# Altium PCB PIC18F57Q84_Curiosity_Nano.PcbDoc (part 1 of 3)
Units mm, origin at the board's own origin, x right, y up, seen from the top; angles counter-clockwise.
Board outline 83.82 x 20.32 mm, 4 copper layers (Top Layer, Gnd Plane, Pwr Plane, Bottom Layer), stack 1.574 mm thick; 85 components, 108 nets, 442 pads, 224 vias.
Unrouted connection lines stored in the file: 1.
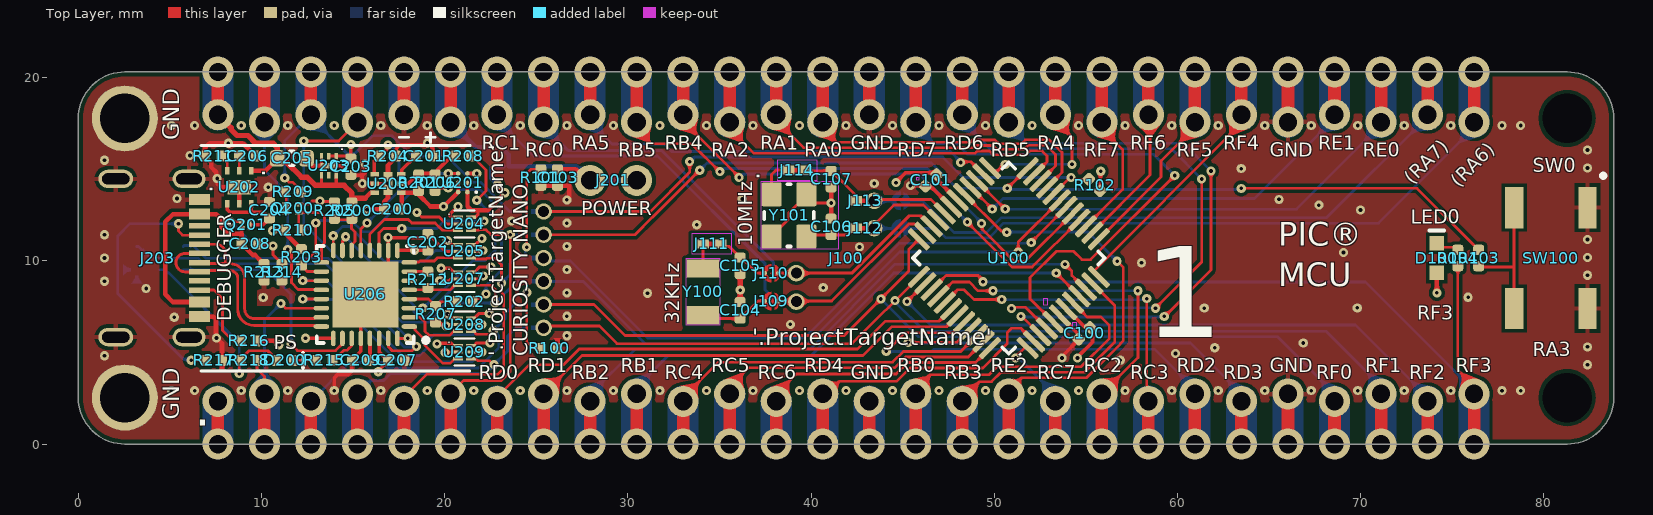
[diagram p0: Top Layer view]
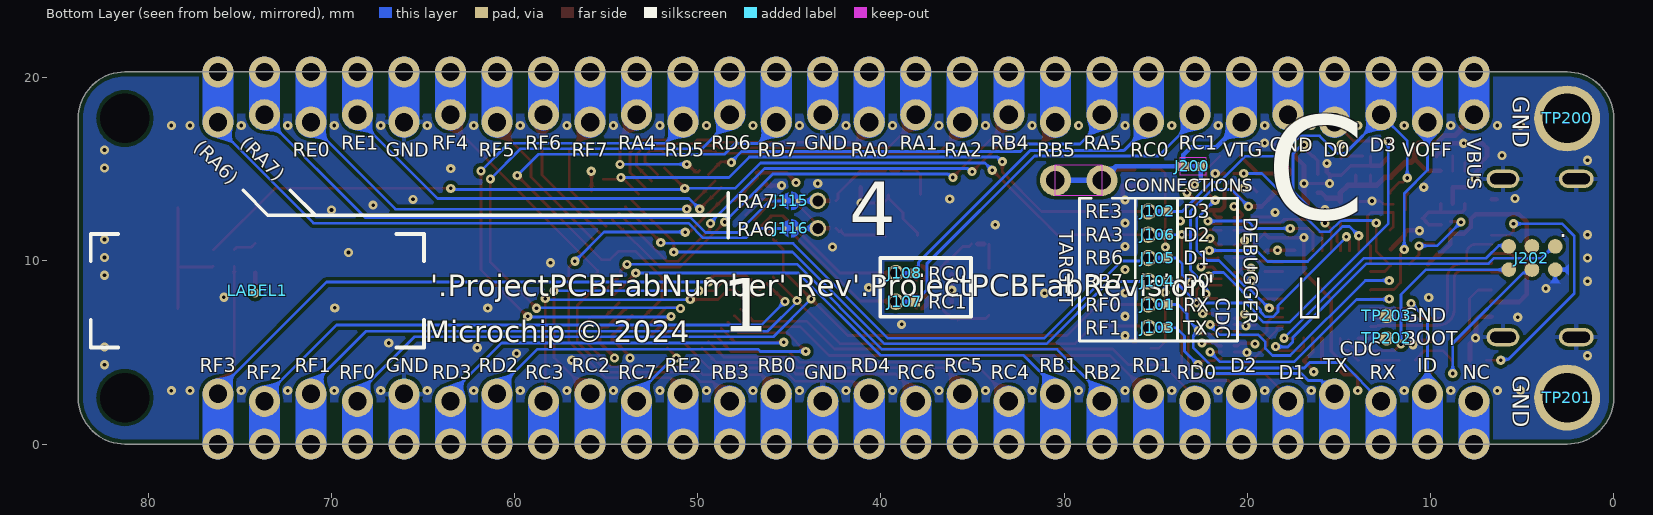
[diagram p1: Bottom Layer view, seen from below]
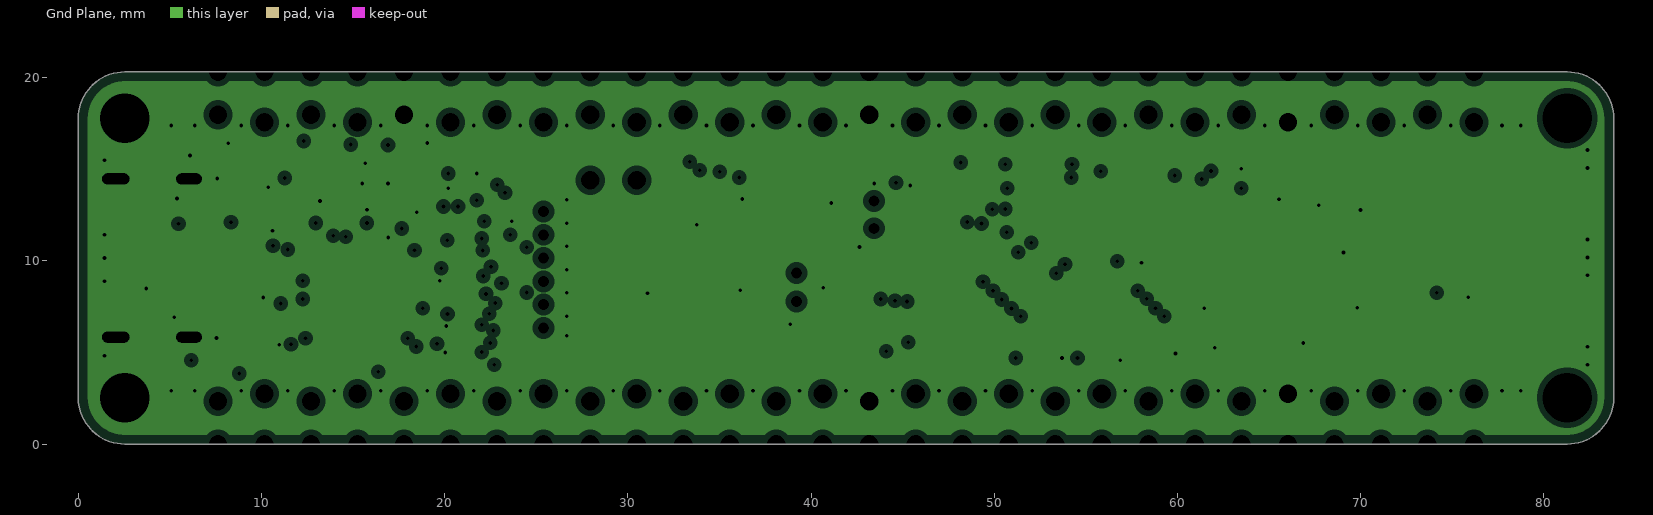
[diagram p2: Gnd Plane, clearances drawn from the general rule]
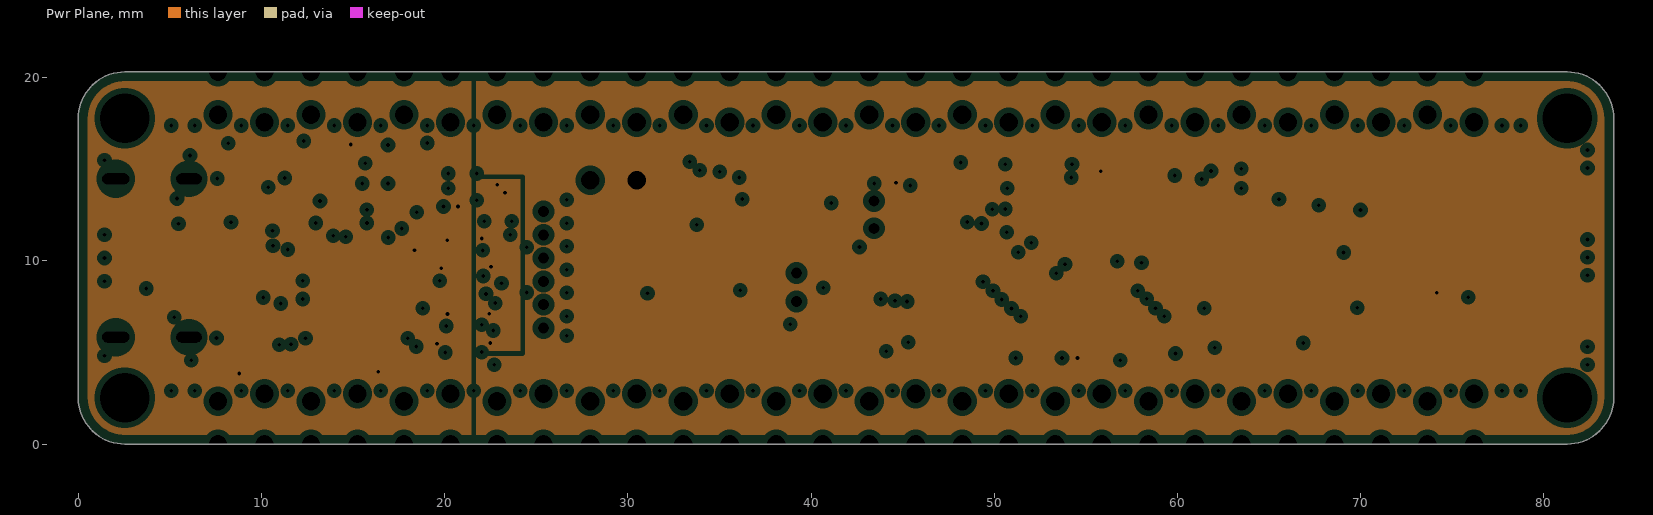
[diagram p3: Pwr Plane, clearances drawn from the general rule]

## Layer stack, top to bottom
Top Solder: solder mask 0.01, Solder Resist, Dk 3.5
Top Layer: signal copper 0.035
Dielectric 1: prepreg 0.1168, PP-016, Dk 4.4
Gnd Plane: plane copper 0.035, net GND
Dielectric2: core 1.2, FR-4, Dk 4.2
Pwr Plane: plane copper 0.035, net (Multiple Nets)
Dielectric 3: prepreg 0.1168, PP-016, Dk 4.4
Bottom Layer: signal copper 0.035
Bottom Solder: solder mask 0.01, Solder Resist, Dk 3.5

## Board outline
0,2.54 0,17.78 cw(c2.54,17.78) 2.54,20.32 81.28,20.32 cw(c81.28,17.78) 83.82,17.78 83.82,2.54 cw(c81.28,2.54) 81.28,0 2.54,0 cw(c2.54,2.54)

## Design rules (kind name [scope] priority, off if disabled: settings)
AcuteAngle [All] p1: minimum=8.00000000000000E+0001 checktracksonly=FALSE
AssemblyTestPointUsage [All] p1: valid=2 allowmultiple=TRUE
AssemblyTestpoint CNANO_Testpoints [HasCompParameterValue('MCHP-ID','CON2115') Or HasCompParameterValue('MCHP-ID','CON2119') Or HasCompParameterValue('MCHP-ID','CON2120')] p1: testpointundercomponent=TRUE minsize=0.8 maxsize=2.54 preferedsize=0.8 minholesize=0 maxholesize=1.27 preferedholesize=0.25 testpointgrid=0.025 usegrid=FALSE gridtolerance=0 allowsidebottom=TRUE minspacing=1.27
AssemblyTestpoint [All] p2: testpointundercomponent=FALSE minsize=0.8 maxsize=2.54 preferedsize=0.8 minholesize=0 maxholesize=1.27 preferedholesize=0.25 testpointgrid=0.025 usegrid=FALSE gridtolerance=0 allowsidebottom=TRUE minspacing=1.27 compbodyclearance=1.27
BoardOutlineClearance BoardOutlineClearance_edge_connector [InComponent('J100')] p1: gap=0 ignorepadtopadclearanceinfootprint=FALSE
BoardOutlineClearance BoardOutlineClearance_LAYERNAME [IsText and (X1 >= 100) and (Y1 <= -60)] p2: gap=0 ignorepadtopadclearanceinfootprint=FALSE
BoardOutlineClearance [All] p3: gap=0.25 ignorepadtopadclearanceinfootprint=FALSE
Clearance Clearance_Poly_Impedance [IsRegion vs InDifferentialPairClass('All Differential Pairs')] p1: gap=0.6 ignorepadtopadclearanceinfootprint=FALSE
Clearance Clearance_Poly [InPoly] p2: gap=0.2 ignorepadtopadclearanceinfootprint=FALSE
Clearance [All] p3: gap=0.15 ignorepadtopadclearanceinfootprint=FALSE except(0.3: Arc-Hole Track-Hole SMDPad-Hole THPad-Hole Via-Hole Fill-Hole Poly-Hole Region-Hole Text-Hole)
ComponentClearance ComponentClearance_EDGE [InComponent('J100')] p1: gap=0 collisioncheckmode=3 verticalgap=0 showdistances=FALSE
ComponentClearance [All] p2: gap=0.254 collisioncheckmode=3 verticalgap=0.254 showdistances=TRUE donotcheckwithout3dbody=TRUE
DiffPairsRouting [All] p1: maxlimit=0.22 minlimit=0.22 mostfreqgap=0.22 toplayer_minwidth=0.16 toplayer_maxwidth=0.16 toplayer_prefwidth=0.16 bottomlayer_minwidth=0.16 bottomlayer_maxwidth=0.16 bottomlayer_prefwidth=0.16 maxuncoupledlength=5
FabricationTestPointUsage TestPointUsage [All] p1 off: valid=2 allowmultiple=TRUE
FabricationTestpoint Testpoint [All] p1 off: side=2 testpointundercomponent=TRUE minsize=0.8 maxsize=2.54 preferedsize=0.8 minholesize=0 maxholesize=1.27 preferedholesize=0.25 testpointgrid=0 allowsidebottom=TRUE usegrid=FALSE gridtolerance=0 minspacing=1.27
HoleSize [All] p1: absolutevalues=TRUE maxlimit=6.2 minlimit=0.2 maxpercent=80.000 minpercent=20.000
HoleToHoleClearance [All] p1: gap=0.3 allowstackedmicrovias=FALSE
MinimumAnnularRing [All] p1: minimumring=0.15
MinimumSolderMaskSliver LevelShifters [HasCompParameterValue('MCHP-ID','IC1665')] p1: minsoldermaskwidth=0.075
MinimumSolderMaskSliver [All] p2: minsoldermaskwidth=0.08
NetAntennae [Not IsTestpoint] p1: netantennaetolerance=0
PlaneClearance [All] p1: clearance=0.3
PlaneConnect PlaneConnect_MountingHoles [HasPad('TP200-1') OR HasPad('TP201-1')] p1: planeconnectstyle=Direct reliefexpansion=0.508 reliefentries=4 reliefconductorwidth=0.254 reliefairgap=0.254
PlaneConnect [All] p2: pad.planeconnectstyle=Relief pad.reliefexpansion=0.25 pad.reliefentries=4 pad.reliefconductorwidth=0.25 pad.reliefairgap=0.25 via.planeconnectstyle=Direct via.reliefexpansion=0.508 via.reliefentries=4 via.reliefconductorwidth=0.254 via.reliefairgap=0.254
PolygonConnect PolygonConnect_Special [HasPad('TP200-1') OR HasPad('TP201-1') OR HasPad('TP203-1')] p1: connectstyle=Direct reliefconductorwidth=0.254 reliefentries=4 polygonreliefangle="90 Angle" airgapwidth=0.254
PolygonConnect [All] p2: thpad.connectstyle=Relief thpad.reliefconductorwidth=0.254 thpad.reliefentries=4 thpad.polygonreliefangle="90 Angle" thpad.airgapwidth=0.2 smdpad.connectstyle=Relief smdpad.reliefconductorwidth=0.254 smdpad.reliefentries=4 smdpad.polygonreliefangle="90 Angle" smdpad.airgapwidth=0.2 via.connectstyle=Direct via.reliefconductorwidth=0.254 via.reliefentries=4 via.polygonreliefangle="90 Angle" via.airgapwidth=0.2
RoutingVias [All] p1: holewidth=0.25 width=0.55 viastyle="Through Hole" minholewidth=0.2 minwidth=0.5 maxholewidth=0.5 maxwidth=1
SMDNeckDown [All] p1: percent=98.000
SilkToSilkClearance SilkToSilkClearance_Text [IsText] p1: silktosilkclearance=0
SilkToSilkClearance [All] p2: silktosilkclearance=0.1
SilkToSolderMaskClearance SilkscreenOverComponentPads_Soldermask [All] p1: minsilkscreentomaskgap=0.12 clearancetoexposedcopper=FALSE
SilkToSolderMaskClearance SilkscreenOverComponentPads_Copper [All] p2: minsilkscreentomaskgap=0.2 clearancetoexposedcopper=TRUE
SolderMaskExpansion SolderMaskTenting [IsVia AND NOT (IsFabTestpoint OR IsAssyTestpoint)] p1: expansion=-1 istentingtop=FALSE
SolderMaskExpansion [All] p2: expansion=0.06 istentingtop=FALSE
SupplyNets "Schematic Supply Nets_9" [InNet('VCC_REGULATOR')] p1: voltage=0.000
SupplyNets "Schematic Supply Nets_8" [InNet('VBUS')] p2: voltage=0.000
SupplyNets "Schematic Supply Nets_7" [InNet('VCC_VBUS')] p3: voltage=0.000
SupplyNets "Schematic Supply Nets_6" [InNet('GND')] p4: voltage=0.000
SupplyNets "Schematic Supply Nets_5" [InNet('VCC_EDGE')] p5: voltage=0.000
SupplyNets "Schematic Supply Nets_4" [InNet('VCC_P3V3')] p6: voltage=0.000
SupplyNets "Schematic Supply Nets_3" [InNet('VCC_MCU_CORE')] p7: voltage=0.000
SupplyNets "Schematic Supply Nets_2" [InNet('VCC_LEVEL')] p8: voltage=0.000
SupplyNets "Schematic Supply Nets_1" [InNet('VCC_TARGET')] p9: voltage=0.000
SupplyNets "Schematic Supply Nets" [InNet('VBUS_DELAYED')] p10: voltage=0.000
UnRoutedNet [All] p1: checkbadconnections=TRUE
ViasUnderSMD ViasUnderSMD_Testpoint [HasPad('TP202-1') OR HasPad('U200-7')] p1: allowed=TRUE
ViasUnderSMD [All] p2: allowed=FALSE
Width [All] p1: maxlimit=10 minlimit=0.125 preferedwidth=0.15 minimp=50.000000 maximp=50.000000 favimp=50.000000
15 further rules are at their usual default settings.

## Classes and differential pairs
component class PIC18F57Q84_Curiosity_Nano_TopLevel: LABEL1 Test1 Test2
component class S2: C100 C101 C103 C104 C105 C106 C107 D100 J100 J101 J102 J103 J104 J105 J106 J107 J108 J109 J110 J111 J112 J113 J114 J115 J116 R100 R101 R102 R103 R104 SW100 U100 Y100 Y101
component class S1: C200 C201 C202 C203 C204 C205 C206 C207 C208 C209 D200 J200 J201 J202 J203 Q200 Q201 R200 R201 R202 R203 R204 R205 R206 R207 R208 R209 R210 R211 R212 R213 R214 R215 R216 R217 R218 TP200 TP201 TP202 TP203 U200 U201 U202 U203 U204 U205 U206 U207 U208 U209
net class Power: GND VCC_EDGE VCC_LEVEL VCC_P3V3 VCC_REGULATOR VCC_VBUS
differential pair USBD: +USBD_P -USBD_N

## Components (designator, comment, footprint, x,y, rotation, side; value= is the part's Value field where it differs from the comment)
C100 "Capacitor NP" CAP_C_0402#1 54.925,6.05 r225 top locked value=0.1uF
C101 "Capacitor NP" CAP_C_0402#1 46.55,14.4 r45 top locked value=0.1uF
C103 "Capacitor NP" CAP_C_0402#1 26.162,14.554 r90 top locked value=2.2uF
C104 "Capacitor NP" CAP_C_0402#2 36.135,7.3 r270 top locked value=3.9pF
C105 "Capacitor NP" CAP_C_0402#2 36.135,9.736 r270 top locked value=3.9pF
C106 "Capacitor NP" CAP_C_0402#1 41.1,11.86 r270 top locked value=18pF
C107 "Capacitor NP" CAP_C_0402#1 41.1,14.47 r90 top locked value=22pF
C200 "Capacitor NP" CAP_C_0402#1 17.145,12.827 r0 top locked value=2.2uF
C201 "Capacitor NP" CAP_C_0402#1 18.88,15.725 r0 top locked value=0.1uF
C202 "Capacitor NP" CAP_C_0402#1 19.08,11.025 r270 top locked value=0.1uF
C203 "Capacitor NP" CAP_C_0402#1 14.879,15.15 r90 top locked value=2.2uF
C204 "Capacitor NP" CAP_C_0402#1 10.434,12.777 r270 top locked value=2.2uF
C205 "Capacitor NP" CAP_C_0603 11.658,15.597 r180 top locked value=4.7uF
C206 "Capacitor NP" CAP_C_0402#1 9.235,15.725 r180 top locked value=2200pF
C207 "Capacitor NP" CAP_C_0402#1 17.355,4.575 r0 top locked value=0.1uF
C208 "Capacitor NP" CAP_C_0402#1 9.368,10.931 r180 top locked value=0.1uF
C209 "Capacitor NP" CAP_C_0402#1 15.405,4.575 r0 top locked value=1uF
D100 "LED_yellow" LED_0603_Yellow 74.168,10.16 r90 top locked value="Yellow LED"
D200 "LED_green" LED_0402_GREEN 11.265,4.575 r0 top locked value="LED SINGLE SML-P12MTT86R YELLOW-GREEN"
J100 "CON EDGE CNANO-56" CON_EDGE_CNANO-56 7.62,10.16 r0 top locked value="EDGE 56P Female CNANO"
J101 "CON JMPR LINK CLOSED" CON_JMPR_0402_PCB_TRACE_LINK_0.9mm_PAD_0.6mm_PTH 24.875,7.62 r0 bottom locked net-tie value="CON JMPR LINK CLOSED_0.9mm TH PAD"
J102 "CON JMPR LINK CLOSED" CON_JMPR_0402_PCB_TRACE_LINK_0.9mm_PAD_0.6mm_PTH 24.875,12.7 r0 bottom locked net-tie value="CON JMPR LINK CLOSED_0.9mm TH PAD"
J103 "CON JMPR LINK CLOSED" CON_JMPR_0402_PCB_TRACE_LINK_0.9mm_PAD_0.6mm_PTH 24.875,6.35 r0 bottom locked net-tie value="CON JMPR LINK CLOSED_0.9mm TH PAD"
J104 "CON JMPR LINK CLOSED" CON_JMPR_0402_PCB_TRACE_LINK_0.9mm_PAD_0.6mm_PTH 24.875,8.89 r0 bottom locked net-tie value="CON JMPR LINK CLOSED_0.9mm TH PAD"
J105 "CON JMPR LINK CLOSED" CON_JMPR_0402_PCB_TRACE_LINK_0.9mm_PAD_0.6mm_PTH 24.875,10.16 r0 bottom locked net-tie value="CON JMPR LINK CLOSED_0.9mm TH PAD"
J106 "CON JMPR LINK CLOSED" CON_JMPR_0402_PCB_TRACE_LINK_0.9mm_PAD_0.6mm_PTH 24.875,11.43 r0 bottom locked net-tie value="CON JMPR LINK CLOSED_0.9mm TH PAD"
J107 "CON JMPR LINK CLOSED" CON_JMPR_0402_PCB_TRACE_LINK_0.9mm_PAD_0.6mm_PTH 38.675,7.775 r0 bottom locked net-tie value="CON JMPR LINK CLOSED_0.9mm TH PAD"
J108 "CON JMPR LINK CLOSED" CON_JMPR_0402_PCB_TRACE_LINK_0.9mm_PAD_0.6mm_PTH 38.675,9.332 r0 bottom locked net-tie value="CON JMPR LINK CLOSED_0.9mm TH PAD"
J109 "CON JMPR SOLDER-STRAP OPEN SMD" CON_JMPR_1mmX1mm_ROUND_SOLDER-STRAP#1 37.838,7.807 r180 top locked value="CON JMPR SODER-STRAP OPEN"
J110 "CON JMPR SOLDER-STRAP OPEN SMD" CON_JMPR_1mmX1mm_ROUND_SOLDER-STRAP#1 37.838,9.332 r180 top locked value="CON JMPR SODER-STRAP OPEN"
J111 "CON JMPR LINK CLOSED" CON_JMPR_0402_PCB_TRACE_LINK 34.578,10.926 r180 top locked net-tie value="CON 0402 PCB TRACE LINK"
J112 "CON JMPR LINK CLOSED" CON_JMPR_0402_PCB_TRACE_LINK_0.9mm_PAD_0.6mm_PTH 42.925,11.785 r0 top locked net-tie value="CON JMPR LINK CLOSED_0.9mm TH PAD"
J113 "CON JMPR LINK CLOSED" CON_JMPR_0402_PCB_TRACE_LINK_0.9mm_PAD_0.6mm_PTH 42.925,13.285 r0 top locked net-tie value="CON JMPR LINK CLOSED_0.9mm TH PAD"
J114 "CON JMPR LINK CLOSED" CON_JMPR_0402_PCB_TRACE_LINK 39.25,14.96 r180 top locked net-tie value="CON 0402 PCB TRACE LINK"
J115 "CON JMPR SOLDER-STRAP OPEN SMD" CON_JMPR_1mmX1mm_ROUND_SOLDER-STRAP#2 44.9,13.275 r180 bottom locked value="CON JMPR SODER-STRAP OPEN"
J116 "CON JMPR SOLDER-STRAP OPEN SMD" CON_JMPR_1mmX1mm_ROUND_SOLDER-STRAP#2 44.9,11.775 r180 bottom locked value="CON JMPR SODER-STRAP OPEN"
J200 "CON JMPR LINK CLOSED" CON_JMPR_0402_PCB_TRACE_LINK 23.015,15.162 r0 bottom locked net-tie value="CON 0402 PCB TRACE LINK"
J201 "CON JMPR LINK CLOSED" CON_JMPR_2.54_1x2_TH_PCB_TRACE_LINK 29.21,14.402 r0 top locked net-tie value="CON JMPR 1x2 PCB TRACE LINK"
J202 "TP ARRAY NO BOM" TESTPOINT_ARRAY_2x3_1.27mm_pitch_SMD 4.46,10.16 r0 bottom locked value="TESTPOINT ARRAY 2x3 JTAG"
J203 "CON USB2.0-C RCPT SMD RA KLS KLS1-5409" CON_USB2.0-C_RCPT_SMD_RA_KLS_KLS1-5409 3.4,10.16 r270 top locked value="USB2.0 Type-C FEMALE"
LABEL1 "08-10015" 08-10015 74.05,8.375 r180 bottom locked value="PCBA LABEL 18X6mm"
Q200 "Transistor MOS-N GSD" X1-DFN1006-3 11.69,12.875 r180 top locked value=DMN65D8LFB-7B
Q201 "Transistor MOS-P GSD" LGA-3_GSD_0.7x0.6_CSD25501F3 9.102,11.975 r0 top locked value=CSD25501F3
R100 "Resistor" RES_C_0402 25.705,5.228 r0 top locked value=47k
R101 "Resistor" RES_C_0402 25.248,14.554 r270 top locked value=47k
R102 "Resistor" RES_C_0402 55.479,14.146 r315 top locked value=47k
R103 "Resistor" RES_C_0402 76.454,10.16 r270 top locked value=1k
R104 "Resistor" RES_C_0402 75.311,10.16 r90 top locked value=1k
R200 "Resistor" RES_C_0402 14.929,12.75 r270 top locked value=47k
R201 "Resistor" RES_C_0402 18.58,14.275 r90 top locked value=47k
R202 "Resistor" RES_C_0402 21.079,7.775 r0 top locked value=47k
R203 "Resistor" RES_C_0402 12.175,10.194 r90 top locked value=47k
R204 "Resistor" RES_C_0402 16.905,15.725 r0 top locked value=47k
R205 "Resistor" RES_C_0402 13.979,12.75 r270 top locked value=47k
R206 "Resistor" RES_C_0402 19.48,14.275 r90 top locked value=27k
R207 "Resistor" RES_C_0402 19.505,7.079 r90 top locked value=47k
R208 "Resistor" RES_C_0402 20.992,15.725 r0 top locked value=33k
R209 "Resistor" RES_C_0402 11.715,13.775 r0 top locked value=1k
R210 "Resistor" RES_C_0402 11.715,11.684 r180 top locked value=47k
R211 "Resistor" RES_C_0402 7.363,15.725 r180 top locked value=470R
R212 "Resistor" RES_C_0402 19.08,8.974 r90 top locked value=1k
R213 "Resistor" RES_C_0402 10.144,9.375 r270 top locked value=47k
R214 "Resistor" RES_C_0402 11.11,9.375 r270 top locked value=47k
R215 "Resistor" RES_C_0402 13.43,4.575 r0 top locked value=1k
R216 "Resistor" RES_C_0402 9.302,5.633 r0 top locked value=5.1k
R217 "Resistor" RES_C_0402 7.394,4.575 r0 top locked value=5.1k
R218 "Resistor" RES_C_0402 9.298,4.575 r180 top locked value=1k
SW100 "Switch 4 Pin" SW_TACT_SMD_DW_TS604VM1-035CR-R 80.391,10.16 r270 top locked value="TACT SPST"
TP200 "Test Point No BOM" TP_3.6X2.7 2.54,17.78 r90 bottom locked value="TP TH D3.6H2.7"
TP201 "Test Point No BOM" TP_3.6X2.7 2.54,2.54 r90 bottom locked value="TP TH D3.6H2.7"
TP202 "Test Point No BOM" CON_TP_0.8dia_SMD_with_Test_Jig_Layer 12.4,5.777 r180 bottom locked value="TP SMD D0.8"
TP203 "Test Point No BOM" CON_TP_0.8dia_SMD_with_Test_Jig_Layer 12.4,7 r180 bottom locked value="TP SMD D0.8"
U100 "PIC18F5xQ84 TQFP-48" TQFP-48_7x7 50.8,10.16 r135 top locked value=PIC18F57Q84-I/PT
U200 "MIC53XX ADJ MLF-6" "MLF-6 1.6X1.6mm" 16.905,14.225 r0 top locked value=MIC5353YMT-TR
U201 "MIC94163_1.5MM_1MM" MIC94163_1.5MM_1MM 21.013,14.267 r180 top locked value=MIC94163YCS
U202 "MIC2008YML-TR VDFN-6" VDFN-6_2x2_EP0.8X1.40 8.785,14.028 r270 top locked value=MIC2008
U203 "MIC5528MT DFN-6" DFN-6_1.2x1.2 13.679,15.2 r180 top locked value="MIC5528 3V3"
U204 "74LVC(H)1T45 SOT-23-6_SC-70-6_SOT-6_SOT-363_DSBGA" X2-DFN1010-6 21.079,12.025 r0 top locked value=74LVC1T45FW4-7
U205 "74LVC(H)1T45 SOT-23-6_SC-70-6_SOT-6_SOT-363_DSBGA" X2-DFN1010-6 21.079,10.525 r0 top locked value=74LVC1T45FW4-7
U206 "SAMD21E QFN-32" QFN-32_5X5_EP3.6x3.6_L 15.67,8.17 r180 top locked value=ATSAMD21E18
U207 "74LVC(H)1T45 SOT-23-6_SC-70-6_SOT-6_SOT-363_DSBGA" X2-DFN1010-6 21.079,9.025 r0 top locked value=74LVC1T45FW4-7
U208 "74LVC(H)1T45 SOT-23-6_SC-70-6_SOT-6_SOT-363_DSBGA" X2-DFN1010-6 21.079,6.525 r0 top locked value=74LVC1T45FW4-7
U209 "74LVC(H)1T45 SOT-23-6_SC-70-6_SOT-6_SOT-363_DSBGA" X2-DFN1010-6 21.079,5.025 r0 top locked value=74LVC1T45FW4-7
Y100 "Crystal 2 Pins" CRYSTAL_VMK3_L3.2W1.5H0.9 34.103,8.316 r90 top locked value=32.768kHz
Y101 "Crystal 4 pins 1-3" CRYSTAL_L3.2W2.5H0.8 38.8,12.485 r270 top locked value=10.000MHz

## Footprints (in the part's own frame and the unit in brackets; to place one, negate y for a bottom-side part, rotate by r counter-clockwise, add the part's x,y. Pads: shape width x height; smd on the part's side, far side on the other; paste and mask are expansions set on the pad)
08-10015 [mm]
  silkscreen extent -9.1,-3.1 9.1,3.1, body extent -9,-3 9,3, height 0.1
CAP_C_0402#1 [mm] "Chip Capacitor, 2-Leads, Body 1.0x0.5mm, IPC High Density"
  rrect50% 0.55x0.6 smd: 1(-0.45,0) 2(0.45,0)
  body extent -0.5,-0.3 0.5,0.3, height 0.2
CAP_C_0402#2 [mm] "Chip Capacitor, 2-Leads, Body 1.0x0.5mm, IPC High Density"
  rrect50% 0.55x0.6 smd paste-1: 1(-0.45,0) 2(0.45,0)
  body extent -0.5,-0.3 0.5,0.3, height 0.2
CAP_C_0603 [mm] "Chip Capacitor, 2-Leads, Body 1.6x0.8mm, IPC Medium Density"
  rrect50% 0.8x0.9 smd: 1(-0.8,0) 2(0.8,0)
  silkscreen extent -0.1,-0.38 0.1,0.38, body extent -0.8,-0.4 0.8,0.4, height 0.65
CON_EDGE_CNANO-56 [mil]
  round 67 hole 39.37 mask+3.94: 1(0,-400) 1(0,-308) 2(100,-400) 2(100,-292) 3(200,-400) 3(200,-308) 4(300,-400) 4(300,-292) 5(400,-400) 5(400,-308) 6(500,-400) 6(500,-292) 7(600,-400) 7(600,-308) 8(700,-400) 8(700,-292) 9(800,-400) 9(800,-308) 10(900,-400) 10(900,-292) 11(1000,-400) 11(1000,-308) 12(1100,-400) 12(1100,-292) 13(1200,-400) 13(1200,-308) 14(1300,-400) 14(1300,-292) 15(1400,-400) 15(1400,-308) 16(1500,-400) 16(1500,-292) 17(1600,-400) 17(1600,-308) 18(1700,-400) 18(1700,-292) 19(1800,-400) 19(1800,-308) 20(1900,-400) 20(1900,-292) 21(2000,-400) 21(2000,-308) 22(2100,-400) 22(2100,-292) 23(2200,-400) 23(2200,-308) 24(2300,-400) 24(2300,-292) 25(2400,-400) 25(2400,-308) 26(2500,-400) 26(2500,-292) 27(2600,-400) 27(2600,-308) 28(2700,-400) 28(2700,-292) 29(2700,292) 29(2700,400) 30(2600,308) 30(2600,400) 31(2500,292) 31(2500,400) 32(2400,308) 32(2400,400) 33(2300,292) 33(2300,400) 34(2200,308) 34(2200,400) 35(2100,292) 35(2100,400) 36(2000,308) 36(2000,400) 37(1900,292) 37(1900,400) 38(1800,308) 38(1800,400) 39(1700,292) 39(1700,400) 40(1600,308) 40(1600,400) 41(1500,292) 41(1500,400) 42(1400,308) 42(1400,400) 43(1300,292) 43(1300,400) 44(1200,308) 44(1200,400) 45(1100,292) 45(1100,400) 46(1000,308) 46(1000,400) 47(900,292) 47(900,400) 48(800,308) 48(800,400) 49(700,292) 49(700,400) 50(600,308) 50(600,400) 51(500,292) 51(500,400) 52(400,308) 52(400,400) 53(300,292) 53(300,400) 54(200,308) 54(200,400) 55(100,292) 55(100,400) 56(0,308) 56(0,400)
  Top Layer lines w27: 0,-400 0,-308 ; 0,308 0,400 ; 100,-400 100,-292 ; 100,292 100,400 ; 200,-400 200,-308 ; 200,308 200,400 ; 300,-400 300,-292 ; 300,292 300,400 ; 400,-400 400,-308 ; 400,308 400,400 ; 500,-400 500,-292 ; 500,292 500,400 ; 600,-400 600,-308 ; 600,308 600,400 ; 700,-400 700,-292 ; 700,292 700,400 ; 800,-400 800,-308 ; 800,308 800,400 ; 900,-400 900,-292 ; 900,292 900,400 ; 1000,-400 1000,-308 ; 1000,308 1000,400 ; 1100,-400 1100,-292 ; 1200,-400 1200,-308 ; 1200,308 1200,400 ; 1300,-400 1300,-292 ; 1300,292 1300,400 ; 1400,-400 1400,-308 ; 1400,308 1400,400 ; 1500,-400 1500,-292 ; 1500,292 1500,400 ; 1600,-400 1600,-308 ; 1600,308 1600,400 ; 1700,-400 1700,-292 ; 1700,292 1700,400 ; 1800,-400 1800,-308 ; 1800,308 1800,400 ; 1900,-400 1900,-292 ; 1900,292 1900,400 ; 2000,-400 2000,-308 ; 2000,308 2000,400 ; 2100,-400 2100,-292 ; 2100,292 2100,400 ; 2200,-400 2200,-308 ; 2200,308 2200,400 ; 2300,-400 2300,-292 ; 2300,292 2300,400 ; 2400,-400 2400,-308 ; 2400,308 2400,400 ; 2500,-400 2500,-292 ; 2500,292 2500,400 ; 2600,-400 2600,-308 ; 2600,308 2600,400 ; 2700,-400 2700,-292 ; 2700,292 2700,400
  Top Layer lines w27.01: 1100,292 1100,400
  Bottom Layer lines w67: 0,-400 0,-308 ; 0,308 0,400 ; 100,-400 100,-292 ; 100,292 100,400 ; 200,-400 200,-308 ; 200,308 200,400 ; 300,-400 300,-292 ; 300,292 300,400 ; 400,-400 400,-308 ; 400,308 400,400 ; 500,-400 500,-292 ; 500,292 500,400 ; 600,-400 600,-308 ; 600,308 600,400 ; 700,-400 700,-292 ; 700,292 700,400 ; 800,-400 800,-308 ; 800,308 800,400 ; 900,-400 900,-292 ; 900,292 900,400 ; 1000,-400 1000,-308 ; 1000,308 1000,400 ; 1100,-400 1100,-292 ; 1100,292 1100,400 ; 1200,-400 1200,-308 ; 1200,308 1200,400 ; 1300,-400 1300,-292 ; 1300,292 1300,400 ; 1400,-400 1400,-308 ; 1400,308 1400,400 ; 1500,-400 1500,-292 ; 1500,292 1500,400 ; 1600,-400 1600,-308 ; 1600,308 1600,400 ; 1700,-400 1700,-292 ; 1700,292 1700,400 ; 1800,-400 1800,-308 ; 1800,308 1800,400 ; 1900,-400 1900,-292 ; 1900,292 1900,400 ; 2000,-400 2000,-308 ; 2000,308 2000,400 ; 2100,-400 2100,-292 ; 2100,292 2100,400 ; 2200,-400 2200,-308 ; 2200,308 2200,400 ; 2300,-400 2300,-292 ; 2300,292 2300,400 ; 2400,-400 2400,-308 ; 2400,308 2400,400 ; 2500,-400 2500,-292 ; 2500,292 2500,400 ; 2600,-400 2600,-308 ; 2600,308 2600,400 ; 2700,-400 2700,-292 ; 2700,292 2700,400
  Multi-Layer pour cut-out: -40,-310 -40,-450 2740,-450 2740,-310
  Multi-Layer pour cut-out: 2740,310 2740,450 -40,450 -40,310
CON_JMPR_1mmX1mm_ROUND_SOLDER-STRAP#1 [mm]
  round 0.25 smd paste-4 mask-2: 1(-0.375,0) 2(0.375,0)
  round 1.05 on Top Solder: 5(0,0)
  Top Layer region: 0,-0.5 0.217,-0.45 0.391,-0.312 0.487,-0.111 0.487,0.111 0.391,0.312 0.217,0.45 0,0.5 0,0.5 0,0.325 0.25,0.075 0.25,-0.075 0,-0.325
  Top Layer region: -0.175,-0.468 -0.373,-0.333 -0.485,-0.12 -0.486,0.12 -0.373,0.333 -0.175,0.468 -0.175,0.468 -0.175,0.25 0.075,0 -0.175,-0.25
CON_JMPR_1mmX1mm_ROUND_SOLDER-STRAP#2 [mm]
  round 0.25 smd paste-4 mask-2: 1(-0.375,0) 2(0.375,0)
  round 1.05 on Bottom Solder: 5(0,0)
  Top Layer region: -0.175,-0.468 -0.373,-0.333 -0.485,-0.12 -0.486,0.12 -0.373,0.333 -0.175,0.468 -0.175,0.468 -0.175,0.25 0.075,0 -0.175,-0.25
  Top Layer region: 0,-0.5 0.217,-0.45 0.391,-0.312 0.487,-0.111 0.487,0.111 0.391,0.312 0.217,0.45 0,0.5 0,0.5 0,0.325 0.25,0.075 0.25,-0.075 0,-0.325
CON_JMPR_2.54_1x2_TH_PCB_TRACE_LINK [mm]
  round 1.7 hole 1.02: 1(-1.27,0) 2(1.27,0)
  Bottom Layer lines w0.3: -1.27,0 1.27,0
CON_JMPR_0402_PCB_TRACE_LINK [mm]
  rect 0.65x0.5 smd paste-1: 1(-0.475,0) 2(0.475,0)
  Top Layer lines w0.254: 0.2,0 -0.175,0
CON_JMPR_0402_PCB_TRACE_LINK_0.9mm_PAD_0.6mm_PTH [mm]
  rect 0.65x0.5 smd paste-1: 1(-0.475,0)
  round 0.9 hole 0.6 paste-2539.97: 2(0.525,0)
  Top Layer region: -0.175,0.125 0.175,0.125 0.175,-0.125 -0.175,-0.125
CON_TP_0.8dia_SMD_with_Test_Jig_Layer [mil]
  round 31.5 smd paste-39.37: 1(0,0)
CON_USB2.0-C_RCPT_SMD_RA_KLS_KLS1-5409 [mm]
  rrect50% 1x1.8 on Top Paste: 0(-4.32,2.645) 0(4.32,2.645)
  rrect50% 1x1.9 on Top Paste: 0(-4.32,-1.355) 0(4.32,-1.355)
  oval 1x1.8 hole 0.6 slot 1.4 at 90 deg: 1(-4.32,2.645) 2(4.32,2.645)
  oval 1x1.9 hole 0.6 slot 1.5 at 90 deg: 3(-4.32,-1.355) 4(4.32,-1.355)
  rect 0.6x1.15 smd: A1/B12(-3.2,3.21) A4/B9(-2.4,3.21) B1/A12(3.2,3.21) B4/A9(2.4,3.21)
  rect 0.3x1.15 smd: A5(-1.25,3.21) A6(-0.25,3.21) A7(0.25,3.21) A8(1.25,3.21) B5(1.75,3.21) B6(0.75,3.21) B7(-0.75,3.21) B8(-1.75,3.21)
  body extent -4.47,-3.46 4.47,3.45, height 3.26
CRYSTAL_L3.2W2.5H0.8 [mm] "L=3.2mm, W=2.5mm, H=0.8mm"
  rrect15% 1.3x1.1 smd: 1(-1.15,-0.95) 2(1.15,-0.95) 3(1.15,0.95) 4(-1.15,0.95)
  silkscreen extent -1.7,-1.35 1.7,1.35, body extent -1.6,-1.25 1.6,1.25, height 0.82
CRYSTAL_VMK3_L3.2W1.5H0.9 [mm]
  rect 1x1.8 smd paste-2539.97: 1(-1.275,0) 2(1.275,0)
  body extent -1.61,-0.76 1.61,0.76, height 0.91
DFN-6_1.2x1.2 [mm] "DFN, 6-Leads, Body 1.2x1.2mm (max), Pitch 0.65"
  rect 0.18x0.35 smd paste-1 mask+0.05: 1(-0.4,-0.525) 2(0,-0.525) 3(0.4,-0.525) 4(0.4,0.525) 5(0,0.525) 6(-0.4,0.525)
  rect 0.94x0.3 smd paste-0.04 mask+0.05: 7(0,0)
  body extent -0.62,-0.62 0.63,0.63, height 0.6
LED_0402_GREEN [mm] "LED chip 0402"
  rect 0.5x0.6 smd: 1(-0.45,0) 2(0.45,0)
  silkscreen extent 1,-0.4 1,0.4, body extent -0.5,-0.3 0.5,0.3, height 0.2
LED_0603_Yellow [mm] "LED chip 0603"
  rect 0.8x0.8 smd: 1(-0.8,0) 2(0.8,0)
  silkscreen extent 1.5,-0.4 1.5,0.4, body extent -0.81,-0.4 0.81,0.4, height 0.6
LGA-3_GSD_0.7x0.6_CSD25501F3 [mm]
  rrect50% 0.25x0.2 on Top Paste: 0(-0.175,-0.2) 0(-0.175,0.2)
  rrect80% 0.35x0.25 smd paste-2539.97 mask-0.05: 1(-0.175,0.175) 2(-0.175,-0.175)
  rrect80% 0.25x0.6 smd paste-0.05 mask-0.05: 3(0.225,0)
  body extent -0.37,-0.32 0.37,0.32, height 0.22
MIC94163_1.5MM_1MM [mm] "6-ball, Body 1.5x1.0mm), Pitch 0.35"
  round 0.25 smd mask+0.05: A1(-0.229,0.508) A2(0.279,0.508) B1(-0.229,0) B2(0.279,0) C1(-0.229,-0.508) C2(0.279,-0.508)
  silkscreen extent -0.76,0.46 -0.66,0.56, body extent -0.5,-0.75 0.5,0.75, height 0.8
"MLF-6 1.6X1.6mm" [mm]
  rect 0.45x0.25 smd mask+0.045: 1(-0.725,0.5) 2(-0.725,0) 3(-0.725,-0.5) 4(0.725,-0.5) 5(0.725,0) 6(0.725,0.5)
  rect 0.5x1.26 smd paste-0.1 mask+0.05: 7(0,0)
  body extent -0.82,-0.8 0.8,0.8, height 0.55
QFN-32_5X5_EP3.6x3.6_L [mm] "QFN, 32-Leads, Body 5.00x5.00mm, Pitch 0.50mm, Thermal Pad 3.60x3.60mm, Least Density"
  oval 0.85x0.25 smd: 1(-2.4,1.75) 2(-2.4,1.25) 3(-2.4,0.75) 4(-2.4,0.25) 5(-2.4,-0.25) 6(-2.4,-0.75) 7(-2.4,-1.25) 8(-2.4,-1.75) 17(2.4,-1.75) 18(2.4,-1.25) 19(2.4,-0.75) 20(2.4,-0.25) 21(2.4,0.25) 22(2.4,0.75) 23(2.4,1.25) 24(2.4,1.75)
  oval 0.25x0.85 smd: 9(-1.75,-2.4) 10(-1.25,-2.4) 11(-0.75,-2.4) 12(-0.25,-2.4) 13(0.25,-2.4) 14(0.75,-2.4) 15(1.25,-2.4) 16(1.75,-2.4) 25(1.75,2.4) 26(1.25,2.4) 27(0.75,2.4) 28(0.25,2.4) 29(-0.25,2.4) 30(-0.75,2.4) 31(-1.25,2.4) 32(-1.75,2.4)
  rect 3.6x3.6 smd paste-5 mask+0: 33(0,0)
  silkscreen extent -3.43,-2.65 2.65,2.65, body extent -2.55,-2.55 2.55,2.55, height 1
RES_C_0402 [mm] "Chip Resistor, 2-Leads, Body 1.0x0.5mm, IPC Medium Density"
  rrect50% 0.55x0.6 smd: 1(-0.45,0) 2(0.45,0)
  body extent -0.5,-0.3 0.5,0.3, height 0.2
SW_TACT_SMD_DW_TS604VM1-035CR-R [mm]
  rect 2.25x1 smd: 1(-2.75,2) 2(2.75,2) 3(-2.75,-2) 4(2.75,-2)
  silkscreen extent -4.59,2.76 -4.39,2.96, body extent -3.4,-3.21 3.4,3.22, height 3.47
TESTPOINT_ARRAY_2x3_1.27mm_pitch_SMD [mm]
  round 0.8 smd paste-1: 1(-1.27,-0.635) 2(-1.27,0.635) 3(0,-0.635) 4(0,0.635) 5(1.27,-0.635) 6(1.27,0.635)
TP_3.6X2.7 [mm] "Test Point round, diam=3.6mm, drill=2.7mm"
  round 3.6 hole 2.7: 1(0,0)
TQFP-48_7x7 [mm] "TSQFP, 48-Leads, Body 7x7mm (max), Pitch 0.50mm, IPC Medium Density"
  rrect50% 1.5x0.3 smd paste-0.025 mask+0.05: 1(-4.2,2.75) 2(-4.2,2.25) 3(-4.2,1.75) 4(-4.2,1.25) 5(-4.2,0.75) 6(-4.2,0.25) 7(-4.2,-0.25) 8(-4.2,-0.75) 9(-4.2,-1.25) 10(-4.2,-1.75) 11(-4.2,-2.25) 12(-4.2,-2.75) 25(4.2,-2.75) 26(4.2,-2.25) 27(4.2,-1.75) 28(4.2,-1.25) 29(4.2,-0.75) 30(4.2,-0.25) 31(4.2,0.25) 32(4.2,0.75) 33(4.2,1.25) 34(4.2,1.75) 35(4.2,2.25) 36(4.2,2.75)
  rrect50% 0.3x1.5 smd paste-0.025 mask+0.05: 13(-2.75,-4.2) 14(-2.25,-4.2) 15(-1.75,-4.2) 16(-1.25,-4.2) 17(-0.75,-4.2) 18(-0.25,-4.2) 19(0.25,-4.2) 20(0.75,-4.2) 21(1.25,-4.2) 22(1.75,-4.2) 23(2.25,-4.2) 24(2.75,-4.2) 37(2.75,4.2) 38(2.25,4.2) 39(1.75,4.2) 40(1.25,4.2) 41(0.75,4.2) 42(0.25,4.2) 43(-0.25,4.2) 44(-0.75,4.2) 45(-1.25,4.2) 46(-1.75,4.2) 47(-2.25,4.2) 48(-2.75,4.2)
  silkscreen extent -3.7,-3.7 3.7,3.7, body extent -4.51,-4.51 4.51,4.51, height 1.1
VDFN-6_2x2_EP0.8X1.40 [mm]
  rect 0.36x0.26 on Top Paste: 0(-0.88,0.65) 0(-0.88,0) 0(-0.88,-0.65) 0(0.88,0.65) 0(0.88,0) 0(0.88,-0.65)
  rect 0.6x0.4 on Top Paste: 0(0,0.3) 0(0,-0.3)
  rect 0.4x0.26 smd paste-1: 1(-0.9,0.65) 2(-0.9,0) 3(-0.9,-0.65) 4(0.9,-0.65) 5(0.9,0) 6(0.9,0.65)
  rect 0.8x1.3 smd paste-1: 7(0,0)
  body extent -1,-1 1,1, height 0.9
X1-DFN1006-3 [mm]
  oval 0.508x0.229 on Top Paste: 0(-0.4,0.25) 0(-0.4,-0.25)
  rect 0.4x0.25 smd paste-1: 1(-0.35,0.225) 2(-0.35,-0.225)
  rect 0.4x0.7 smd: 3(0.35,0)
  silkscreen extent -0.85,0.25 -0.85,0.25, body extent -0.5,-0.3 0.5,0.3, height 0.4
X2-DFN1010-6 [mm] "DFN, 6-Leads, Body 1.0x1.0mm), Pitch 0.35"
  rect 0.535x0.185 smd mask+0.05: 1(-0.357,0.357) 3(-0.357,-0.357) 4(0.357,-0.357) 6(0.357,0.357)
  rect 0.535x0.17 smd mask+0.05: 2(-0.357,0) 5(0.357,0)
  silkscreen extent -0.55,-0.75 0.55,0.74, body extent -0.53,-0.53 0.53,0.53, height 0.4

## Part data
C100 C101 C201 C202 C207 C208: library part CAP1033, Manufacturer 1=KEMET, Manufacturer 2="Samsung Electro-Mechanics", Manufacturer 3="Würth Elektronik", Manufacturer 6=Yageo, Manufacturer Part Number 1=C0402C104K4RAC7867, Manufacturer Part Number 2=CL05B104KO5NNNC, Manufacturer Part Number 3=885012205037, Manufacturer Part Number 4=CL05B104KO5NNND, Manufacturer Part Number 5=CL05B104KO5NNNO, Manufacturer Part Number 6=CC0402KRX7R7BB104, Operating Temperature="-55C to +125C", Package=0402, Supplier Part Number 1=399-C0402C104K4RAC7867TR-ND, Temperature Coefficient=X7R, Tolerance=10%, Voltage=16V, Category=Capacitor, Description_="CAP CER 0.1uF 16V 10% X7R SMD 0402", Manufacturer 4="Samsung Electro-Mechanics", Manufacturer 5="Samsung Electro-Mechanics", Populated=Yes, Restricted Sourcing=No, Revision=11, Supplier 1=Digi-Key, Supplier 2=Digi-Key, Supplier 3=Digi-Key, Supplier 4=Mouser, Supplier 5="Samsung Electro-Mechanics", Supplier 6=Yageo, Supplier Part Number 2=1276-1001-1-ND, Supplier Part Number 3=732-7532-1-ND, Supplier Part Number 4=187-CL05B104KO5NNND, Supplier Part Number 5=CL05B104KO5NNNO, Supplier Part Number 6=CC0402KRX7R7BB104, Symbol="Capacitor NP", Type=Ceramic
C103 C200 C203 C204: library part CAP1208, Manufacturer 1=Murata, Manufacturer 2="Samsung Electro-Mechanics", Manufacturer Part Number 1=GRM155R61A225KE95D, Manufacturer Part Number 2=CL05A225KP5NSNC, Operating Temperature="-55C to +85C", Package=0402, Temperature Coefficient=X5R, Tolerance=10%, Voltage=10V, Category=Capacitor, Description_="CAP CER 2.2uF 10V 10% X5R SMD 0402", Populated=YES, Restricted Sourcing=No, Revision=4, Supplier 1=Murata, Supplier 2="Samsung Electro-Mechanics", Supplier Part Number 1=GRM155R61A225KE95D, Supplier Part Number 2=CL05A225KP5NSNC, Symbol="Capacitor NP", Type=Ceramic
C104 C105: library part CAP2410, Manufacturer 1="KYOCERA AVX", Manufacturer 2=Kemet, Manufacturer Part Number 1=04025A3R9CAT2A, Manufacturer Part Number 2=C0402C399C5GACTU, Operating Temperature="-55C to +125C", Package=0402, Supplier Part Number 1=478-1065-1-ND, Temperature Coefficient=C0G, Tolerance=0.25pF, Voltage=50V, Category=Capacitor, Description_="CAP CER 3.9pF 50V 0.25pF C0G SMD 0402", Populated=YES, Restricted Sourcing=No, Revision=2, Supplier 1=Digi-Key, Supplier 2=Digi-Key, Supplier Part Number 2=399-7793-1-ND, Symbol="Capacitor NP", Type=Ceramic
C106: library part CAP1091, Manufacturer 1=Murata, Manufacturer 3="Samsung Electro-Mechanics", Manufacturer 4=Yageo, Manufacturer Part Number 1=GCM1555C1H180JA16D, Manufacturer Part Number 2=GRM1555C1H180JA01D, Manufacturer Part Number 3=CL05C180JB5NNNC, Manufacturer Part Number 4=CC0402JRNPO9BN180, Manufacturer Part Number 5=GRM1555C1H180JZ01, Operating Temperature="-55C to +125C", Package=0402, Supplier Part Number 1=490-12650-2-ND, Temperature Coefficient=C0G, Tolerance=5%, Voltage=50V, Category=Capacitor, Description_="CAP CER 18pF 50V 5% C0G SMD 0402", Manufacturer 2=Murata, Manufacturer 5=Murata, Populated=YES, Restricted Sourcing=No, Revision=5, Supplier 1=Digi-Key, Supplier 2=Digi-Key, Supplier 3="Samsung Electro-Mechanics", Supplier 4=Yageo, Supplier 5=Murata, Supplier Part Number 2=490-5858-1-ND, Supplier Part Number 3=CL05C180JB5NNNC, Supplier Part Number 4=CC0402JRNPO9BN180, Supplier Part Number 5=GRM1555C1H180JZ01, Symbol="Capacitor NP", Type=Ceramic
C107: library part CAP1042, Manufacturer 1=Murata, Manufacturer Part Number 1=GRM1555C1H220JA01D, Operating Temperature="-55C to +125C", Package=0402, Supplier Part Number 1=490-5868-2-ND, Temperature Coefficient=NP0, Tolerance=5%, Voltage=50V, Category=Capacitor, Description_="CAP CER 22pF 50V 5% NP0 SMD 0402", Populated=Yes, Restricted Sourcing=No, Revision=4, Supplier 1=Digi-Key, Symbol="Capacitor NP", Type=Ceramic
C205: library part CAP0543, Manufacturer 1=KEMET, Manufacturer 2="Taiyo Yuden", Manufacturer 3="Samsung Electro-Mechanics", Manufacturer Part Number 1=C0603C475K8PAC7867, Manufacturer Part Number 2=LMK107BJ475KA-T, Manufacturer Part Number 3=CL10A475KP8NNNC, Operating Temperature="-55C to +85C", Package=0603, Supplier Part Number 1=399-C0603C475K8PAC7867CT-ND, Temperature Coefficient=X5R, Tolerance=10%, Voltage=10V, Category=Capacitor, Description_="CAP CER 4.7uF 10V 10% X5R SMD 0603", Populated=Yes, Restricted Sourcing=No, Revision=6, Supplier 1=Digi-Key, Supplier 2=Digi-Key, Supplier 3="Samsung Electro-Mechanics", Supplier Part Number 2=587-1441-1-ND, Supplier Part Number 3=CL10A475KP8NNNC, Symbol="Capacitor NP", Type=Ceramic
C206: library part CAP1265, Manufacturer 1=KEMET, Manufacturer Part Number 1=C0402C222J3GACTU, Operating Temperature="-55C to +125C", Package=0402, Supplier Part Number 1=399-8957-1-ND, Temperature Coefficient=C0G, Tolerance=5%, Voltage=25V, Category=Capacitor, Description_="CAP CER 2200pF 25V 5% C0G SMD 0402", Populated=YES, Restricted Sourcing=No, Revision=1, Supplier 1=Digi-Key, Symbol="Capacitor NP", Type=Ceramic
C209: library part CAP0616, Manufacturer 1=KEMET, Manufacturer 2=Kemet, Manufacturer Part Number 1=C0402C105K9PACTU, Manufacturer Part Number 2=C0402C105K9PAC7867, Operating Temperature="-55C to +85C", Package=0402, Supplier Part Number 1=399-4873-1-ND, Temperature Coefficient=X5R, Tolerance=10%, Voltage=6.3V, Category=Capacitor, Description_="CAP CER 1uF 6.3V 10% X5R SMD 0402", Populated=Yes, Restricted Sourcing=No, Revision=5, Supplier 1=Digi-Key, Supplier 2=Digi-Key, Supplier Part Number 2=399-C0402C105K9PAC7867TR-ND, Symbol="Capacitor NP", Type=Ceramic
D100: library part DIODE1547, "LED", Forward Current=20mA, Manufacturer 1="Rohm Semiconductor", Manufacturer Part Number 1=SML-D12Y1WT86, Package=0603, Supplier Part Number 1=SML-D12Y1WT86CT-ND, Category=Diode, Description_="LED YELLOW DIFFUSED 1608 SMD", Populated=YES, Restricted Sourcing=No, Revision=1, Supplier 1=Digi-Key, Symbol=LED_yellow, Type="LED Single"
D200: library part LED1092, "LED", Forward Current=20mA, Manufacturer 1="Rohm Semiconductor", Manufacturer Part Number 1=SML-P12MTT86R, Operating Temperature="-40C to +85C", Package=0402, Power=54mW, Reverse Current=10uA, Reverse Voltage=5V, Category=Diode, Description_="DIO LED YELLOW-GREEN 2.2V 20mA 25mcd Clear SMD 0402", Populated=YES, Restricted Sourcing=No, Revision=1, Supplier 1="Rohm Semiconductor", Supplier Part Number 1=SML-P12MTT86R, Symbol=LED_green, Type="LED Single"
J100: library part CON2113, Assembly Type=SMD, Category=Connector, Description_="CON EDGE CURIOSITY-NANO 2.54 56P Female PCB TH", Populated=MECH, Restricted Sourcing=No, Revision=1, Symbol="CON EDGE CNANO-56", Type="Edge Card"
J101 J102 J103 J104 J105 J106 J107 J108 J112 J113: library part CON2115, Assembly Type=Mechanical, Category=Connector, Description_="CON JUMPER 0402 CLOSED PCB TRACE LINK MANUAL CUT WITH 0.9mm TH PADS", Populated=DNP, Restricted Sourcing=No, Revision=1, Symbol="CON JMPR LINK CLOSED", Type="Test Point"
J109 J110 J115 J116: library part CON2117, Assembly Type=SMD, Category=Connector, Description_="CON JUMPER SOLDER-STRAP OPEN 1mm X 1mm ROUND SMD", Populated=DNP, Restricted Sourcing=No, Revision=1, Symbol="CON JMPR SOLDER-STRAP OPEN SMD", Type="Test Point"
J111 J114 J200: library part CON2116, Assembly Type=Mechanical, Category=Connector, Description_="CON JUMPER 0402 CLOSED PCB TRACE LINK MANUAL CUT", Populated=DNP, Restricted Sourcing=No, Revision=1, Symbol="CON JMPR LINK CLOSED"
J201: library part CON2118, Assembly Type=Mechanical, Category=Connector, Description_="CON JUMPER-2.54 1x2 PCB TRACE LINK MANUAL CUT", Populated=DNP, Restricted Sourcing=No, Revision=1, Symbol="CON JMPR LINK CLOSED", Type="Header 2.54mm"
J202: library part CON2119, Assembly Type=SMD, Category=Connector, Description_="CON TP ARRAY 2x3 1.27mm pitch JTAG", Populated=DNP, Restricted Sourcing=No, Revision=1, Symbol="TESTPOINT ARRAY 2x3 JTAG", Type="Header 1.27mm"
J203: library part CON2580, Current=5A, Manufacturer 1="KLS Electronic", Manufacturer Part Number 1=L-KLS1-5409-R, Operating Temperature="-30C to +85C", Voltage="100V AC", Assembly Type=SMD, Category=Connector, Description_="CON USB2.0 Type-C Female SMD R/A", Populated=YES, Restricted Sourcing=No, Revision=2, Supplier 1="Cabcon A/S", Supplier Part Number 1=L-KLS1-5409-R, Symbol="CON USB2.0-C RCPT SMD RA KLS KLS1-5409", Type=USB
LABEL1: Manufacturer 1="ACT Logimark AS", Manufacturer 2="Sunrise Paper (M) Sdn Bhd", Manufacturer 3=Raynen, Manufacturer Part Number 1=505462, Manufacturer Part Number 2=037268-5, Manufacturer Part Number 3=10010407, Category=MCHP-Manufacturing, Description_="LABEL PCBA 18x6mm Datamatrix Assy# / Rev / Serial / Date", Populated=MECH, Revision=4, Supplier 1="ACT Logimark AS", Supplier 2="Microchip Technology", Supplier 3=Raynen, Supplier Part Number 1=505462, Supplier Part Number 2=01000-004967, Supplier Part Number 3=10010407, Symbol=08-10015, Type="PCBA Label"
Q200: library part TRA1340, "Transistor MOS", Current=260mA, Drain to Source Voltage=60V, Manufacturer 1="Diodes Incorporated", Manufacturer Part Number 1=DMN65D8LFB-7, Manufacturer Part Number 2=DMN65D8LFB-7B, Package=X1-DFN1006-3, Power=430mW, Supplier Part Number 1=DMN65D8LFB-7DITR-ND, Category=Transistor, Description_="TRANS FET N-CH DMN65D8LFB-7B 260mA 60V 430mW X1_DFN1006-3", Manufacturer 2="Diodes Incorporated", Populated=YES, Restricted Sourcing=No, Revision=3, Supplier 1=Digi-Key, Supplier 2=Digi-Key, Supplier Part Number 2=DMN65D8LFB-7BDICT-ND, Symbol="Transistor MOS-N GSD", Type=FET, Voltage=60V
Q201: library part TRA1611, "Transistor MOS", Current=-3.6A, Drain to Source Voltage=-20V, Manufacturer 1="Texas Instruments", Manufacturer Part Number 1=CSD25501F3, Manufacturer Part Number 2=CSD25501F3T, Operating Temperature="-55C to +150C", Package=LGA, Supplier Part Number 1=296-51017-2-ND, Category=Transistor, Description_="TRANS FET P-CH CSD25501F3 -20V -3.6A 0.076R LGA", Gate to Source Voltage=-20V, Manufacturer 2="Texas Instruments", Populated=YES, Restricted Sourcing=No, Revision=1, Supplier 1=Digi-Key, Supplier 2=Digi-Key, Supplier Part Number 2=296-47556-2-ND, Symbol="Transistor MOS-P GSD", Type=FET, Voltage=-20V
R100 R101 R102 R200 R201 R202 R203 R204 R205 R207 R210 R213 R214: library part RES2662, Manufacturer 1=Yageo, Manufacturer Part Number 1=RC0402FR-0747KL, Package=0402, Supplier Part Number 1=311-47.0KLRCT-ND, Tolerance=1%, Voltage=50V, Category=Resistor, Composition=TKF, Description_="RES TKF 47k 1% 1/16W SMD 0402", Populated=YES, Restricted Sourcing=No, Revision=3, Supplier 1=Digi-Key, Symbol=Resistor, Type="RES SMD"
R103 R104 R209 R212 R215 R218: library part RES1022, Manufacturer 1=Panasonic, Manufacturer Part Number 1=ERJ-2RKF1001X, Operating Temperature="-55C to +155C", Package=0402, Power=1/10W, Supplier Part Number 1=P1.00KLTR-ND, Temperature Coefficient=100ppm/C, Tolerance=1%, Voltage=50V, Category=Resistor, Composition=TKF, Description_="RES TKF 1k 1% 1/10W SMD 0402", Populated=YES, Revision=3, Supplier 1=Digi-Key, Symbol=Resistor, Type="RES SMD"
R206: library part RES2661, Manufacturer 1=Yageo, Manufacturer Part Number 1=RC0402FR-0727KL, Package=0402, Supplier Part Number 1=311-27.0KLRCT-ND, Tolerance=1%, Voltage=50V, Category=Resistor, Composition=TKF, Description_="RES TKF 27k 1% 1/16W SMD 0402", Populated=YES, Restricted Sourcing=No, Revision=3, Supplier 1=Digi-Key, Symbol=Resistor, Type="RES SMD"
R208: library part RES1994, Manufacturer 1=Yageo, Manufacturer Part Number 1=AC0402FR-0733KL, Operating Temperature="-55C to +155C", Package=0402, Power=1/16W, Supplier Part Number 1=YAG3477CT-ND, Temperature Coefficient=100ppm/C, Tolerance=1%, Category=Resistor, Composition=TKF, Description_="RES TKF 33k 1% 1/16W SMD 0402", Populated=YES, Restricted Sourcing=No, Revision=2, Supplier 1=Digi-Key, Symbol=Resistor, Type="RES SMD"
R211: library part RSMT1163, Manufacturer 1=Yageo, Manufacturer Part Number 1=RC0402FR-07470RL, Package=0402, Supplier Part Number 1=311-470LRCT-ND, Tolerance=1%, Category=Resistor, Description_="RES TKF 470R 1% 1/16W MF 0402", Populated=YES, Restricted Sourcing=No, Revision=2, Supplier 1=Digi-Key, Symbol=resistor, Type="RES SMD"
R216 R217: library part RES1655, Manufacturer 1="Panasonic Electronic Components", Manufacturer Part Number 1=ERJ-2RKF5101X, Operating Temperature="-55C to +155C", Package=0402, Power=1/10W, Supplier Part Number 1=P5.10KLCT-ND, Temperature Coefficient=100ppm/C, Tolerance=1%, Category=Resistor, Composition=TKF, Description_="RES TKF 5.1k 1% 1/10W SMD 0402", Populated=YES, Revision=1, Supplier 1=Digi-Key, Symbol=Resistor, Type="RES SMD"
SW100: library part SWITCH1172, "Switch", Current=50mA, Manufacturer 1="Dailywell Electronics Co.,Ltd.", Manufacturer Part Number 1=TS604VM1-035CR-R, Operating Temperature="-40C to +85C", Voltage=12V, Category=Switch, Description_="SWITCH TACT SPST 12 50mA TS604VM1-035CR-R SMD", Populated=YES, Restricted Sourcing=No, Revision=2, Supplier 1="Cabcon A/S", Supplier Part Number 1=TS604VM1-035CR-R, Symbol="Switch 4 Pin", Type=Tactile
TP200 TP201: library part CON2131, "Test Point", Assembly Type=TH, Category=Connector, Description_="CON TP PAD PCB TH D3.6H2.7", Populated=Yes, Restricted Sourcing=No, Revision=1, Symbol="Test Point No Bom", Type="Test Point No BOM"
TP202 TP203: library part CON2120, "Test Point", Assembly Type=SMD, Category=Connector, Description_="CON TP PAD PCB SMD D0.8", Populated=DNP, Restricted Sourcing=No, Revision=1, Symbol="Test Point No BOM", Type="Test Point No BOM"
U100: library part MIC8901, Manufacturer 1="Microchip Technology", Manufacturer Part Number 1=PIC18F57Q84T-I/PT, Manufacturer Part Number 2=PIC18F57Q84-I/PT, Operating Temperature="-40C to +85C", Category=MCHP-Microcontroller, Description_="MCHP MCU 8-BIT 64MHz 128kB 8kB PIC18F57Q84-I/PT TQFP-48", Manufacturer 2="Microchip Technology", Populated=YES, Restricted Sourcing=No, Revision=2, Supplier 1="Microchip Technology", Supplier 2="Microchip Technology", Supplier Part Number 1=PIC18F57Q84T-I/PT, Supplier Part Number 2=PIC18F57Q84-I/PT, Symbol="PIC18F5xQ84 TQFP-48", Type=8-Bit
U200: library part MIC7389, "LDO Regulator", Manufacturer 1="Microchip Technology", Manufacturer Part Number 1=MIC5353YMT-TR, Operating Temperature="-40C to +125C", Supplier Part Number 1=576-3681-1-ND, Category=MCHP-Analog, Description_="MCHP ANALOG LDO ADJ 500mA MIC5353YMT-TR MLF-6", Populated=YES, Restricted Sourcing=No, Revision=2, Supplier 1=Digi-Key, Symbol="MIC53XX ADJ MLF-6", Type=LDO
U201: library part MIC8744, Manufacturer 1="Microchip Technology", Manufacturer Part Number 1=MIC94163YCS-TR, Operating Temperature="-40C to +125C", Supplier Part Number 1=576-4454-2-ND, Category=MCHP-Analog, Description_="IC LOAD SWITCH HI SIDE 3A 6WLCSP", Populated=YES, Restricted Sourcing=No, Revision=1, Supplier 1=Digi-Key, Symbol=MIC94163_1.5MM_1MM, Type="Power Switch"
U202: library part MIC9604, Manufacturer 1="Microchip Technology", Manufacturer Part Number 1=MIC2008YML-TR, Operating Temperature="-40C to +85C", Supplier Part Number 1=576-2591-2-ND, Category=MCHP-Analog, Description_="MCHP ANALOG POWER SWITCH 5.5V 2.1A MIC2008YML-TR VDFN-6", Populated=YES, Restricted Sourcing=No, Revision=1, Supplier 1=Digi-Key, Supplier 2="Microchip Technology", Supplier Part Number 2=MIC2008YML-TR, Symbol="MIC2008YML-TR VDFN-6", Type="Power Switch"
U203: library part MIC6905, Manufacturer 1="Microchip Technology", Manufacturer Part Number 1=MIC5528-3.3YMT-TR, Manufacturer Part Number 2=MIC5528-3.3YMT-T5, Operating Temperature="-40C to +125C", Supplier Part Number 1=576-4766-1-ND, Category=MCHP-Analog, Description_="MCHP ANALOG LDO 3.3V MIC5528-3.3YMT-TR 6-TDFN", Manufacturer 2="Microchip Technology", Populated=YES, Revision=3, Supplier 1=Digi-Key, Supplier 2="Microchip Technology", Supplier Part Number 2=MIC5528-3.3YMT-T5, Symbol="MIC5528MT DFN-6", Type=LDO
U204 U205 U207 U208 U209: library part IC1665, Manufacturer 1="Diodes Incorporated", Manufacturer Part Number 1=74LVC1T45FW4-7, Supplier Part Number 1=74LVC1T45FW4-7DICT-ND, Category=IC, Description_="IC VOLTAGE TRANSLATOR BI-DIR 1 CIRCUIT 74LVC1T45FW4-7 X2-DFN1010-6", Populated=YES, Restricted Sourcing=No, Revision=2, Supplier 1=Digi-Key, Symbol="74LVC(H)1T45 SOT-23-6_SC-70-6_SOT-6_SOT-363_DSBGA", Type=Translator
U206: library part MIC8641, Manufacturer 1="Microchip Technology", Manufacturer Part Number 1=ATSAMD21E18A-MUT, Operating Temperature="-40C to +85C", Supplier Part Number 1=ATSAMD21E18A-MUTCT-ND, Category=MCHP-Microcontroller, Description_="MCHP MCU 32-BIT 48MHz 256Kb 32Kb ATSAMD21E18A-MUT QFN-32", Populated=YES, Restricted Sourcing=No, Revision=3, Supplier 1=Digi-Key, Symbol="SAMD21E QFN-32", Type="32-Bit MPU"
Y100: library part MIC9479, "Crystal", Manufacturer 1="Microchip Technology", Manufacturer Part Number 1=VMK3-9002-32K7680000, Manufacturer Part Number 2=VMK3-9002-32K7680000TR, Operating Temperature="-40C to +85C", Category=MCHP-Clock/Timing, Description_="MCHP CRYSTAL 32.768kHz 7pF VMK3-9002-32K7680000 SMD L3.2W1.5H0.9", Manufacturer 2="Microchip Technology", Populated=YES, Restricted Sourcing=No, Revision=2, Supplier 1="Microchip Technology", Supplier 2="Microchip Technology", Supplier Part Number 1=VMK3-9002-32K7680000, Supplier Part Number 2=VMK3-9002-32K7680000TR, Symbol="Crystal 2 Pins", Type=Crystal
Y101: library part IC2551, "Crystal", Manufacturer 1="Microchip Technology", Manufacturer Part Number 1=VXM7-9048-10M0000000, Manufacturer Part Number 2=VXM7-9048-10M0000000TR, Operating Temperature="-40C to +85C", Category=MCHP-Clock/Timing, Description_="MCHP CRYSTAL 10.000MHz 12pF VXM7-9048-10M0000000 SMD L3.2W2.5H0.8", Manufacturer 2="Microchip Technology", Populated=YES, Restricted Sourcing=No, Revision=1, Supplier 1="Microchip Technology", Supplier 2="Microchip Technology", Supplier Part Number 1=VXM7-9048-10M0000000, Supplier Part Number 2=VXM7-9048-10M0000000TR, Symbol="Crystal 4 pins 1-3", Type=Crystal

## Free pads (board coordinates)
  oval 0.203x0.483 on Top Paste: 0(13.267,14.603) 0(13.267,15.797) 0(13.679,14.603) 0(13.679,15.797) 0(14.091,14.603) 0(14.091,15.797)
  round 0 hole 2.7 unplated paste-2539.97: 0(81.28,2.54) 0(81.28,17.78)

## Via types
v1: diameter 0.5, hole 0.2, Top Layer to Bottom Layer, 214 vias
v2: diameter 0.5, hole 0.2, Top Layer to Bottom Layer, tented both sides, 8 vias
v3: diameter 0.5, hole 0.2, Top Layer to Bottom Layer, tented top, 2 vias

## Nets (pads, with @x,y where several pads share a name; then routed paths per layer and width w, separated by ;. In a path a pad name is that pad's centre, name@x,y a point inside that pad or via, vN(x,y) a via of type N, cw(c..) or ccw(c..) an arc to the next point about the centre after c; other vN are vias at no path point)
BOOT: TP202.1 U206.25 | length 1.5
  Top Layer w0.2: v3(12.4,5.777) U206.25@13.933,5.777
CDC_RX: J100.3 J101.1 U208.4 | length 16.7
  Top Layer w0.15: U208.4@21.429,6.175 21.571,6.175 21.746,6 22.437,6 22.637,6.2 v1(22.655,6.2)
  Bottom Layer w0.15: J100.3@12.7,2.337 14.813,4.45 16.591,4.45 16.891,4.15 21.839,4.15 22.955,5.266 22.955,5.9 v1(22.655,6.2) 23.292,6.837 23.292,7.117 23.795,7.62 J101.1@24.4,7.62 ; J101.1@24.4,7.61 J101.1@24.45,7.61
CDC_RX_CTRL: U206.19 U208.5 | length 14.1
  Top Layer w0.15: v1(12.255,8.925) U206.19@13.28,8.925 ; U208.5@21.429,6.525 v1(22.03,6.525)
  Bottom Layer w0.15: v1(12.255,8.925) 12.266,8.936 13.556,8.936 17.659,4.833 18.629,4.833 19.019,5.223 19.019,5.585 19.409,5.975 21.543,5.975 22.03,6.462 v1(22.03,6.525)
CDC_TX: J100.4 J103.1 U209.4 | length 12.6
  Top Layer w0.15: U209.4@21.429,4.675 21.454,4.65 21.705,4.65 21.793,4.562 21.821,4.562 21.833,4.55 22.451,4.55 22.662,4.34 v1(22.7,4.34)
  Bottom Layer w0.15: J100.4@15.24,2.743 15.972,3.475 16.673,3.475 17.048,3.85 22.211,3.85 v1(22.7,4.34) 23.43,5.069 23.43,5.9 23.88,6.35 J103.1@24.4,6.35
CDC_TX_CTRL: U206.21 U209.5 | length 13
  Top Layer w0.15: v1(12.255,7.925) U206.21@13.28,7.924 ; U209.5@21.429,5.025 v1(22.03,5.025)
  Bottom Layer w0.15: v1(12.255,7.925) 12.286,7.894 14.043,7.894 17.447,4.491 21.496,4.491 v1(22.03,5.025)
DAC: R208.2 U206.3 | length 15.3
  Top Layer w0.15: U206.3@18.06,7.424 v1(18.804,7.424) ; R208.2@21.492,15.725 22.254,14.963 22.254,13.816 v1(21.755,13.317) v1@21.755,13.267
  Bottom Layer w0.15: v1(18.804,7.424) 18.83,7.424 19.856,8.45 19.967,8.45 21.541,10.024 22.204,10.024 22.755,10.575 ; 22.755,10.575 22.755,12.317 ; 22.755,10.575 22.755,12.317 ; 22.755,12.317 v1(21.755,13.317) 22.755,12.317
DBG0: J100.53 J104.1 R100.1 U207.4 | length 29.7
  Top Layer w0.15: v1(12.303,16.548) 14.211,16.548 J100.53@15.24,17.577 ; U207.4@21.429,8.675 22.527,8.675 22.755,8.447 v1(22.755,7.7) ; v1(24.486,8.28) 24.486,5.583 24.841,5.228 R100.1@25.255,5.228
  Bottom Layer w0.15: v1(12.303,16.548) 12.303,12.036 17.69,6.649 19.125,6.649 19.579,7.103 19.579,7.213 20.066,7.7 v1(22.755,7.7) 23.945,8.89 J104.1@24.4,8.89 24.475,8.815 v1@24.475,8.215
DBG0_CTRL: U206.15 U207.5 | length 12.5
  Top Layer w0.15: U206.15@14.416,10.556 U206.15@14.416,10.861 ; U206.15@14.42,10.57 14.42,11.07 14.591,11.241 v1(14.591,11.325) ; U207.5@21.429,9.025 21.872,9.025 22.022,9.175 v1(22.104,9.175)
  Bottom Layer w0.15: v1(14.591,11.325) 14.591,11.306 18.329,7.568 18.329,7.227 18.607,6.949 19.001,6.949 19.279,7.227 19.279,7.338 21.306,9.365 21.841,9.365 22.031,9.175 v1(22.104,9.175)
DBG1: J100.5 J105.1 R101.1 U205.4 | length 21.5
  Top Layer w0.15: J100.5@17.78,2.337 17.78,2.565 19.04,3.825 19.046,3.819 22.904,3.819 23.23,4.145 23.23,5.45 23.23,8.15 23.105,8.275 v1(23.105,8.79) 23.105,9.794 22.749,10.15 22.326,10.15 22.276,10.1 21.68,10.1 U205.4@21.605,10.175 ; v1(24.475,10.755) 24.475,14.767 24.713,15.004 R101.1@25.248,15.004
  Bottom Layer w0.15: v1(23.105,8.79) 23.548,9.233 23.548,9.825 23.883,10.16 J105.1@24.4,10.16 24.4,10.68 v1(24.475,10.755)
DBG1_CTRL: U205.5 U206.16 | length 20.3
  Top Layer w0.15: U206.16@13.916,10.556 v1(13.916,11.375) ; U205.5@21.429,10.525 v1@22.054,10.525
  Bottom Layer w0.15: 14.421,11.88 v1(13.916,11.375) 14.421,11.88 ; 14.421,11.88 14.8,11.88 ; 14.421,11.88 14.8,11.88 ; 14.8,11.88 16.705,9.975 ; 14.8,11.88 16.705,9.975 ; 16.705,9.975 18.905,9.975 ; 16.705,9.975 18.905,9.975 ; 18.905,9.975 19.505,10.575 ; 18.905,9.975 19.505,10.575 ; 19.505,10.575 v1(22.079,10.575) 19.505,10.575
DBG2: J100.6 J106.1 U204.4 | length 14.3